# Altium PCB ZNXC.PcbDoc
Units mil, origin at the board's own origin, x right, y up, seen from the top; angles counter-clockwise.
Board outline 2961 x 3255.01 mil, 2 copper layers (Top Layer, Bottom Layer); 77 components, 62 nets, 269 pads, 101 vias.
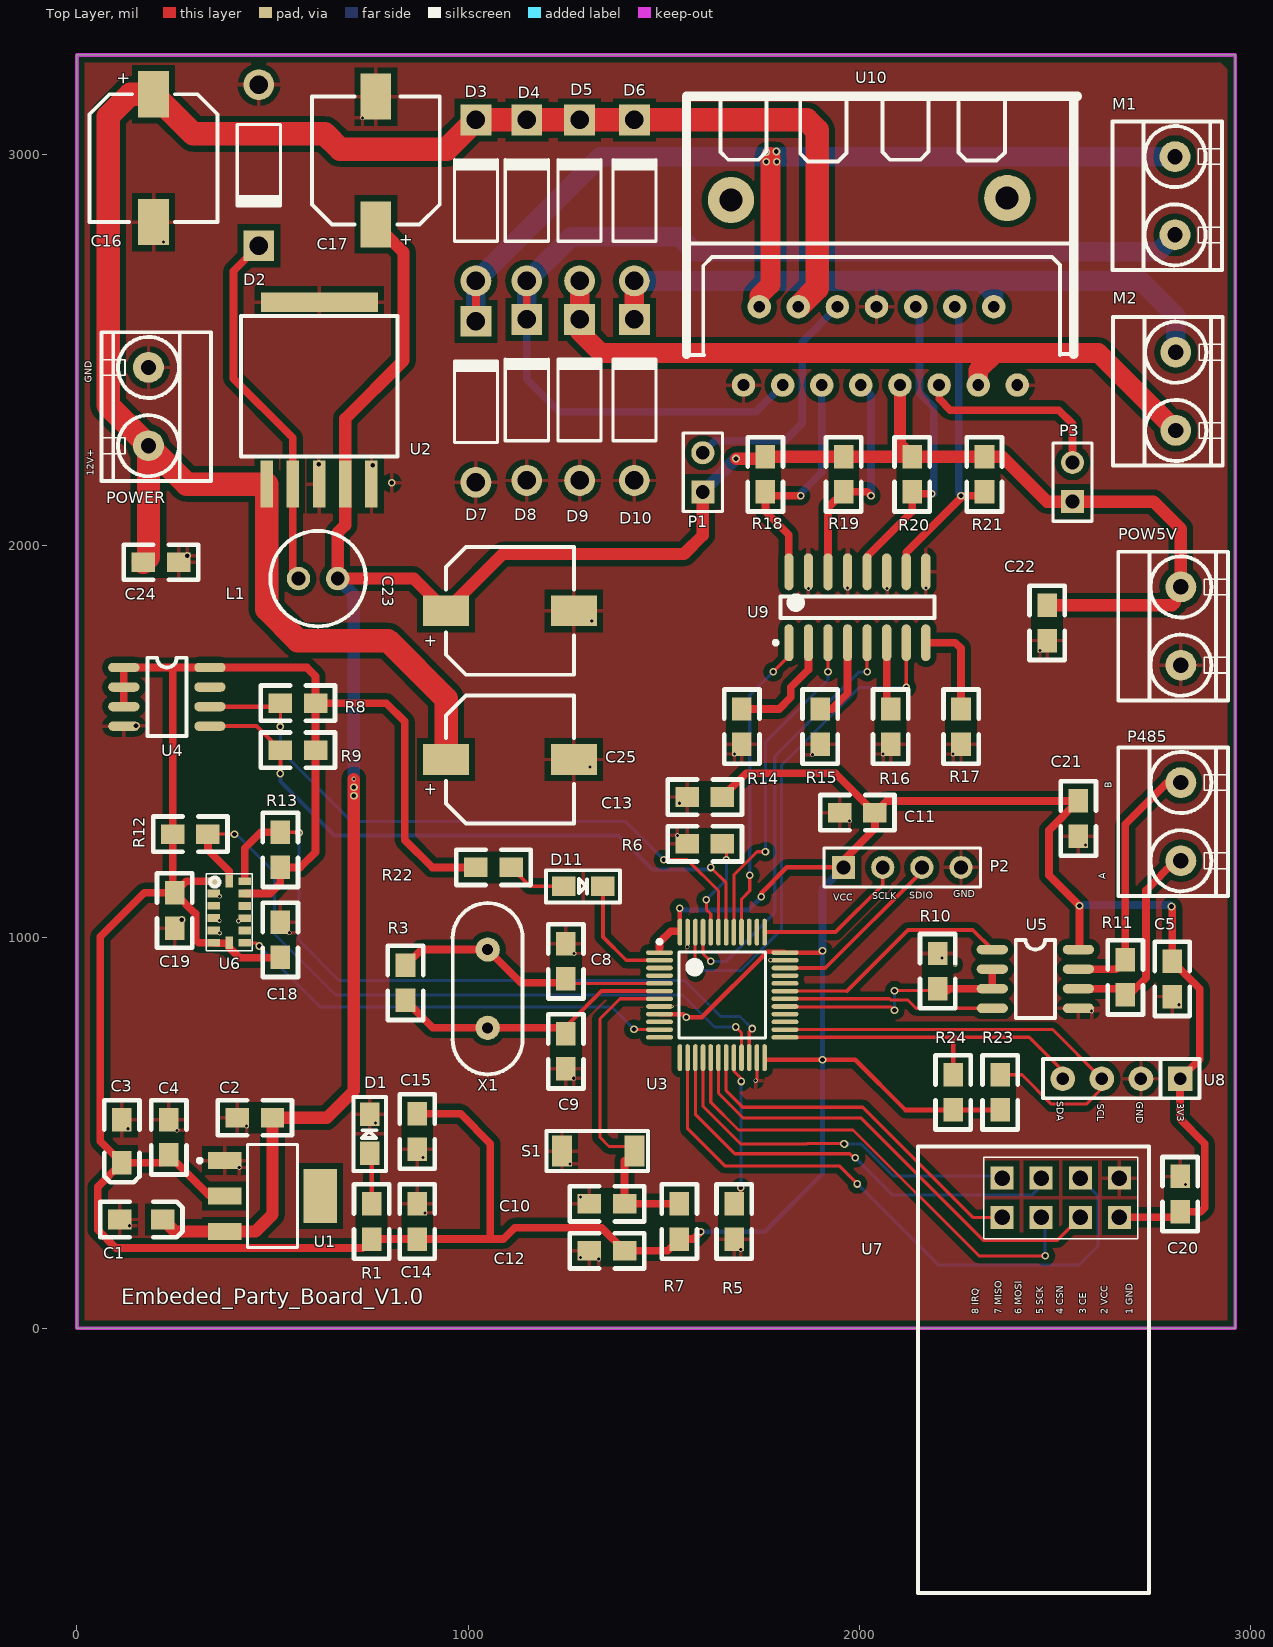
[diagram p0: Top Layer view]
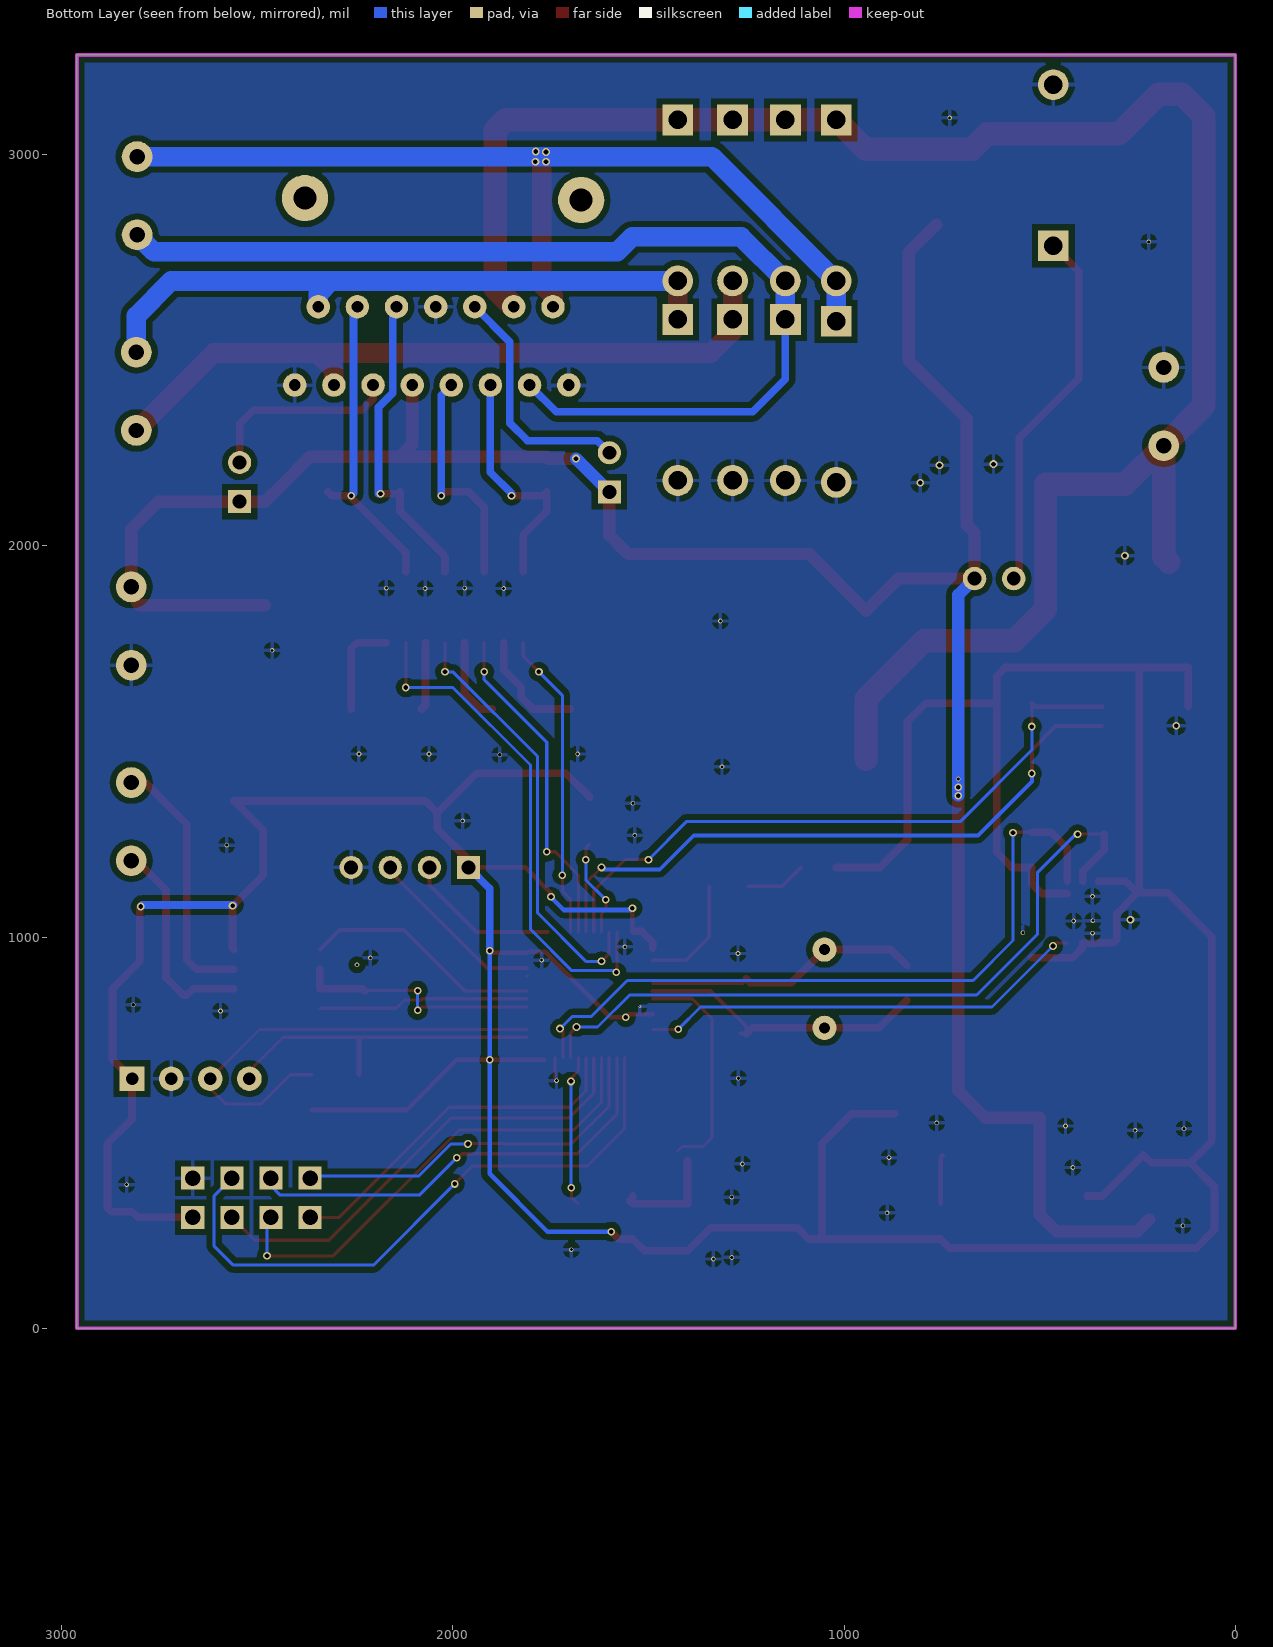
[diagram p1: Bottom Layer view, seen from below]

## Layer stack, top to bottom
Top Layer: signal copper 1.4
Dielectric: dielectric 12.6, FR-4, Dk 4.8
Bottom Layer: signal copper 1.4

## Board outline
0,0 0,3255.01 2961,3255.01 2961,0

## Design rules (kind name [scope] priority, off if disabled: settings)
Clearance Clearance_1 [inpolygon] p1: gap=15
Clearance [All] p2: gap=6
HoleToHoleClearance [All] p1: gap=0 allowstackedmicrovias=TRUE
MinimumSolderMaskSliver [All] p1: minsoldermaskwidth=0
PolygonConnect [All] p1: connectstyle=Relief reliefconductorwidth=10 reliefentries=4 polygonreliefangle="90 Angle"
RoutingVias [All] p1: holewidth=28 width=50 viastyle="Through Hole" minholewidth=28 minwidth=50 maxholewidth=28 maxwidth=50
SilkToSilkClearance [All] p1: silktosilkclearance=0
SilkscreenOverComponentPads [All] p1: minsilkscreentomaskgap=0
SolderMaskExpansion [All] p1: expansion=4
TestPointUsage [All] p1: valid=0 allowmultiple=FALSE
Testpoint [All] p1: side=15 testpointundercomponent=TRUE minsize=40 maxsize=100 preferedsize=60 minholesize=0 maxholesize=40 preferedholesize=32 testpointgrid=1 style=1023 order=0123456789
Width Width_2 [InNet('5V')] p1: maxlimit=31.5 minlimit=31.5 preferedwidth=31.5
Width Width_1 [InNet('12VDC_IN')] p2: maxlimit=100 minlimit=39.37 preferedwidth=39.37
Width [All] p3: maxlimit=100 minlimit=7.87 preferedwidth=19.68
20 further rules are at their usual default settings.

## Components (designator, comment, footprint, x,y, rotation, side; value= is the part's Value field where it differs from the comment)
C1 "10uF" 3216 220,278 r0 top
C2 "104" 0805 500,538 r180 top
C3 "10uF" 3216 115,423 r270 top
C4 "104" 0805 235,443 r90 top
C5 "无源贴片电容" 0805 2800,938 r270 top
C8 "22pF" 0805 1250,893 r90 top
C9 "22pF" 0805 1250,753 r270 top
C10 "104" 0805 1400,318 r180 top
C11 "104" 0805 2040,1318 r180 top
C12 "104" 0805 1400,198 r180 top
C13 "104" 0805 1650,1358 r180 top
C14 "104" 0805 870,228 r90 top
C15 "106" 0805 870,548 r270 top
C16 "100uF" DIP2SMD 180,3138 r0 top
C17 "1000uF" DIP2SMD 780,2838 r180 top
C18 "无源贴片电容" 0805 520,948 r90 top
C19 "无源贴片电容" 0805 250,1023 r90 top
C20 "无源贴片电容" 0805 2820,298 r90 top
C21 "无源贴片电容" 0805 2560,1258 r90 top
C22 "无源贴片电容" 0805 2480,1758 r90 top
C23 "Cap Pol1" DIP2SMD 960,1818 r90 top
C24 "无源贴片电容" 0805 260,1958 r180 top
C25 "Cap Pol1" DIP2SMD 960,1438 r90 top
D1 "Diode" LED 659.97,622.78 r0 top
D2 "1N5822" DO-204AL 465,2973 r270 top
D3 "1N4007" DO-41 1020,2883 r90 top
D4 "1N4007" DO-41 1150,2883 r90 top
D5 "1N4007" DO-41 1285,2883 r90 top
D6 "1N4007" DO-41 1425,2883 r90 top
D7 "1N4007" DO-41 1020,2368 r90 top
D8 "1N4007" DO-41 1150,2373 r90 top
D9 "1N4007" DO-41 1285,2373 r90 top
D10 "1N4007" DO-41 1425,2373 r90 top
D11 "Diode" LED 1420,1218 r270 top
L1 "Inductor" L 720,1798 r180 top
M1 "Header 2" 端子 2805,2898 r90 top locked
M2 "Header 2" 端子 2807,2398 r90 top locked
P1 "Header 2" HDR1X2 1600,2138 r90 top
P2 "SWD" HDR1X4 1960,1178 r0 top
P3 "Header 2" HDR1X2 2545,2113 r90 top
P485 "Header 2" 端子 2820,1298 r90 top locked
POW5V "Header 2" 端子 2820,1798 r90 top locked
POWER "Header 2" 端子 185,2353 r270 top
R1 "510R" 0805 753.24,318 r270 top
R3 "1M" 0805 840,838 r90 top
R5 "10K" 0805 1680,318 r270 top
R6 "10K" 0805 1560,1238 r0 top
R7 "10K" 0805 1540,318 r270 top
R8 "4.7K" 0805 520,1598 r0 top
R9 "4.7K" 0805 520,1478 r0 top
R10 "100R" 0805 2200,958 r270 top
R11 "贴片电阻 1%" 0805 2680,852 r90 top
R12 "4.7K" 0805 245,1263 r0 top
R13 "4.7K" 0805 520,1268 r270 top
R14 "4.7K" 0805 1700,1493 r90 top
R15 "4.7K" 0805 1900,1493 r90 top
R16 "4.7K" 0805 2080,1493 r90 top
R17 "4.7K" 0805 2260,1493 r90 top
R18 "4.7K" 0805 1760,2138 r90 top
R19 "4.7K" 0805 1960,2138 r90 top
R20 "4.7K" 0805 2135,2138 r90 top
R21 "4.7K" 0805 2320,2138 r90 top
R22 "Res2" 0805 1020,1178 r0 top
R23 "4.7K" 0805 2360,558 r90 top
R24 "4.7K" 0805 2240,558 r90 top
S1 "SW-SPST" SWITCH 1330,453 r180 top
U1 "AMS1117-3.3" SOT223 500,338 r270 top
U2 "LM2576" LM2576 625,2373 r0 top
U3 "STM32F103C8T6" STM32F103C8T6 1650,853 r0 top
U4 "MB85RC16PNF-G-JNE1" SO-8 120,1689 r0 top
U5 "MAX3485" SO-8 2340,968 r0 top
U6 "ADXL345" LGA14-ADXL345 350,1143 r0 top
U7 "NRF24L01" NRF24L01 2150,-677 r90 top
U8 "OLED" IDCD4 2820,638 r180 top
U9 "TLP521-4G" SOP-16 1995,1843 r90 top
U10 "L298N" L298N 2040,2758 r0 top locked
X1 "8M" 晶振 1050,873 r90 top

## Footprints (in the part's own frame and the unit in brackets; to place one, negate y for a bottom-side part, rotate by r counter-clockwise, add the part's x,y. Pads: shape width x height; smd on the part's side, far side on the other; paste and mask are expansions set on the pad)
0805 [mil]
  rect 60x50 smd: 1(0,0) 2(90,0)
  silkscreen extent -50,-45 140,45
3216 [mil]
  rect 60x50 smd: 1(0,0) 2(-110,0)
  silkscreen extent -160,-45 50,45
DIP2SMD [mm]
  rect 2x3 smd: 1(0.405,0.417) 2(0.405,-7.883)
  silkscreen extent -3.74,-7.88 4.56,0.42
DO-41 [mm] "Diode, Axial; Body 5.2 x 2.7 mm (LxDia. max), Lead Dia. 0.86 mm (max)"
  round 2 hole 1.2: 1(-5.23,0)
  rect 2x2 hole 1.2: 2(5.23,0)
  silkscreen extent -2.65,-1.42 2.73,1.4
DO-204AL [mm] "Diode, Axial; Body 5.2 x 2.7 mm (LxDia. max), Lead Dia. 0.86 mm (max)"
  round 2 hole 1.2: 1(-5.23,0)
  rect 2x2 hole 1.2: 2(5.23,0)
  silkscreen extent -2.65,-1.41 2.75,1.4
HDR1X2 [mm] "Connector; Header; 2 Position"
  rect 1.5x1.5 hole 0.9: 1(0,0)
  round 1.5 hole 0.9: 2(2.54,0)
  silkscreen extent -1.27,-1.27 3.81,1.27
HDR1X4 [mm] "Connector; Header; 4 Position"
  rect 1.5x1.5 hole 0.9: 1(0,0)
  round 1.5 hole 0.9: 2(2.54,0) 3(5.08,0) 4(7.62,0)
  silkscreen extent -1.27,-1.27 8.89,1.27
IDCD4 [mm]
  rect 1.6x1.6 hole 0.813: 1(0,0)
  round 1.6 hole 0.813: 2(2.54,0) 3(5.08,0) 4(7.62,0)
  silkscreen extent -1.27,-1.27 8.89,1.27
L [mil]
  round 60 hole 35: 1(153.54,-118.34) 2(53.54,-118.34)
  silkscreen extent -19,-240 226,4
L298N [mil]
  round 118.11 hole 59.06: 0(-368,126) 0(338,131)
  round 60 hole 30: 1(-336,-347) 2(-296,-147) 3(-236,-347) 4(-196,-147) 5(-136,-347) 6(-96,-147) 7(-36,-347) 8(4,-147) 9(64,-347) 10(104,-147) 11(164,-347) 12(204,-147) 13(264,-347) 14(304,-147) 15(364,-347)
  silkscreen extent -484,-270 518,391
LED [mil]
  rect 50x60 smd: 1(88.14,-175.52) 2(88.14,-75.52)
  silkscreen extent 47,-220 130,-31
LGA14-ADXL345 [mm] "LCC, 14-Pins, Body 3.0x5.0mm (max), Pitch 0.80mm, IPC Medium Density"
  rect 0.813x0.5 smd: 1(0,0) 2(0,-0.8) 3(0,-1.6) 4(0,-2.4) 5(0,-3.2) 6(0,-4) 8(2.01,-4.01) 9(2.01,-3.21) 10(2.01,-2.41) 11(2.01,-1.61) 12(2.01,-0.81) 13(2.01,-0.01)
  rect 0.5x0.813 smd: 7(1.01,-4.01) 14(1.01,-0.01)
  silkscreen extent -0.49,-4.51 2.51,0.49
LM2576 [mil]
  rect 32x120 smd: 1(-140,-215) 2(-73,-215) 3(-6,-215) 4(61,-215) 5(128,-215)
  rect 300x50 smd: 6(-5,250)
  silkscreen extent -205,-145 195,215
NRF24L01 [mm]
  rect 1.5x1.5 hole 1: 1(26.94,-13.08) 2(24.4,-13.08) 3(26.94,-10.54) 4(24.4,-10.54) 5(26.94,-8) 6(24.4,-8) 7(26.94,-5.46) 8(24.4,-5.46)
  silkscreen extent 0,-15 29,0
SO-8 [mil]
  oval 80x24 smd: 1(0,0) 2(0,-50) 3(0,-100) 4(0,-150) 5(220,-150) 6(220,-100) 7(220,-50) 8(220,0)
  silkscreen extent 60,-175 160,25
SOP-16 [mm] "SOP, 16-Leads, Body 10.0x4.0mm (max), Pitch 1.27mm, IPC Medium Density"
  oval 2.4x0.6 smd: 1(-2.3,4.445) 2(-2.3,3.175) 3(-2.3,1.905) 4(-2.3,0.635) 5(-2.3,-0.635) 6(-2.3,-1.905) 7(-2.3,-3.175) 8(-2.3,-4.445) 9(2.3,-4.445) 10(2.3,-3.175) 11(2.3,-1.905) 12(2.3,-0.635) 13(2.3,0.635) 14(2.3,1.905) 15(2.3,3.175) 16(2.3,4.445)
  silkscreen extent -2.42,-5 0.7,5.42, body extent -2,-5 2,5, height 1.75
SOT223 [mm] "SOT-223/SC-73; 4 Leads; Body 6.7 x 7.3 mm, inc. leads (LxW max)"
  rect 1.1x2.15 smd: 1(-2.3,-3.1) 2(0,-3.1) 3(2.3,-3.1)
  rect 3.5x2.15 smd: 4(0,3.1)
  silkscreen extent -3.35,-4.85 3.35,1.62
STM32F103C8T6 [mm]
  oval 1.75x0.3 smd: 1(-4.082,2.726) 2(-4.082,2.226) 3(-4.082,1.726) 4(-4.082,1.226) 5(-4.082,0.726) 6(-4.082,0.226) 7(-4.082,-0.274) 8(-4.082,-0.774) 9(-4.082,-1.274) 10(-4.082,-1.774) 11(-4.082,-2.274) 12(-4.082,-2.774) 25(4.068,-2.774) 26(4.068,-2.274) 27(4.068,-1.774) 28(4.068,-1.274) 29(4.068,-0.774) 30(4.068,-0.274) 31(4.068,0.226) 32(4.068,0.726) 33(4.068,1.226) 34(4.068,1.726) 35(4.068,2.226) 36(4.068,2.726)
  oval 0.3x1.75 smd: 13(-2.757,-4.099) 14(-2.257,-4.099) 15(-1.757,-4.099) 16(-1.257,-4.099) 17(-0.757,-4.099) 18(-0.257,-4.099) 19(0.243,-4.099) 20(0.743,-4.099) 21(1.243,-4.099) 22(1.744,-4.099) 23(2.243,-4.099) 24(2.744,-4.099) 37(2.744,4.051) 38(2.243,4.051) 39(1.744,4.051) 40(1.243,4.051) 41(0.743,4.051) 42(0.243,4.051) 43(-0.257,4.051) 44(-0.757,4.051) 45(-1.257,4.051) 46(-1.757,4.051) 47(-2.257,4.051) 48(-2.757,4.051)
  silkscreen extent -4.21,-2.82 2.79,3.55
SWITCH [mm]
  rect 1.3x2 smd paste+0 mask+0.2: 1(-2.413,0) 2(2.287,0)
  silkscreen extent -3.3,-1.3 3.3,1.3
晶振 [mil]
  round 62 hole 28: 1(-105,0) 2(95,0)
  silkscreen extent -224,-89 214,89
端子 [mm]
  round 2 hole 1: 1(2.464,-0.051) 2(-2.616,-0.051)
  silkscreen extent -4.9,-3.1 4.75,4.01

## Part data
C1 C16 C17: library part ELECTRO2
C2: library part CAP, "Capacitor"
C3: library part "CAPACITOR POL", "Capacitor"
C4 C5 C18 C19 C20 C21 C22 C24: library part Cap, "Capacitor"
C8 C9 C10 C11 C12 C13 C14 C15: library part CAP1, "Capacitor"
C23 C25: "Polarized Capacitor (Radial)"
D1 D11: "Default Diode"
D2: library part "Diode 11DQ03", "Schottky Rectifier"
D3 D4 D5 D6 D7 D8 D9 D10: library part "Diode 1N4007", "1 Amp General Purpose Rectifier"
M1 M2 P1 P3 P485 POW5V POWER: "Header, 2-Pin"
P2: library part "Header 4H", "Header, 4-Pin, Right Angle"
R1 R3 R5 R6 R7: library part R
R8 R9 R12 R13 R14 R15 R16 R17 R18 R19 R20 R21 R23 R24: library part Res2, "贴片电阻 精度1%"
R10 R11: library part Res2, "Resistor"
R22: "Resistor"
S1: "Single-Pole, Single-Throw Switch"
U1: library part LT1085CM-3.3
U4: "EEPROM存储"
U5: library part SP3485, "485总线芯片"
X1: library part XTAL_SMD, "Crystal Oscillator"

## Via types
v1: diameter 19.68, hole 11.81, Top Layer to Bottom Layer, 47 vias
v2: diameter 11.81, hole 7.87, Top Layer to Bottom Layer, 46 vias
v3: diameter 20, hole 12, Top Layer to Bottom Layer, tented both sides, 7 vias
v4: diameter 7.87, hole 3.94, Top Layer to Bottom Layer, 1 vias

## Nets (pads, with @x,y where several pads share a name; then routed paths per layer and width w, separated by ;. In a path a pad name is that pad's centre, name@x,y a point inside that pad or via, vN(x,y) a via of type N, cw(c..) or ccw(c..) an arc to the next point about the centre after c; other vN are vias at no path point)
3V3: C3.1 C4.1 C5.1 C11.1 C12.1 C13.1 C14.1 C15.1 C18.1 C19.2 C20.1 C21.2 P2.1 R1.2 R7.2 R8.2 R9.2 R12.1 R13.2 R22.1 R23.1 R24.1 U1.2 U3.1 U3.9 U3.24 U3.36 U3.48 U4.1 U4.2 U4.3 U4.8 U5.8 U6.1 U6.6 U6.7 U6.12 U7.2 U8.1 | length 12418
  Top Layer w11.81: U3.9 1550.15,802.85 v1(1558,795) 1598,795 1608,805 1751.19,948.19 1751.19,950.03 1763.97,962.81 1807.7,962.81 U3.36 v1@1901.33,960.33 ; v1(1541,1074) 1541,1067 1541.48,1066.52 U3.48 ; v1(1749,1103) 1749,1112 1815,1178 P2.1 ; 1766,686 v1(1906,686) 1990,686 2118,558 R24.1 R23.1
  Top Layer w19.68: U4.3 U4.2 U4.1 237,1689 ; U6.1 280,1143 C19.2 ; U1.2 340,338 C4.1 215,423 C3.1 ; U6.12 494.11,1111.11 520,1137 R13.2 571,1178 610,1217 R9.2 R8.2 ; C18.1 519.32,947.32 415.68,947.32 389.76,973.24 U6.7 388.89,984.25 351.27,984.25 U6.6 311.48,985.52 303,994 303,1060 C19.2 ; C15.1 981,548 1057,472 1057,228 ; R22.1 908,1178 838,1248 838,1551 791,1598 R8.2 ; 1489.31,972 1489.31,986.31 1518,1015 U3.48@1537,1015 ; v1(1595,247) 1576,228 R7.2 1510,198 C12.1 1341,257 1119,257 1090,228 1057,228 ; C13.1 1711,1419 1939,1419 C11.1 ; P2.1 1960,1197 2040,1277 C11.1 ; U5.8 2563,971 v1(2563,1080) 2485,1158 2485,1273 C21.2 2070,1348 C11.1 ; U7.2 2805.63,283.63 C20.1 2873,298 2883,308 2883,472 2820,535 U8.1 2870,688 2870,868 C5.1 v1@2800,1076 ; C3.1 53,361 53,251.94 99.94,205 730.24,205 R1.2 C14.1 1057,228 ; C3.1 60,478 60,1001 172,1113 C19.2 ; 237,1689 245,1681 R12.1 245,1118 C19.2 ; 237,1689 U4.8 588,1689 610,1667 R8.2
  Bottom Layer w11.81: v1(1541,1074) 1545.75,1069.25 1716.25,1069.25 v1@1749,1102 ; v1(1595,247) 1758,247 1906,395 v1(1906,686) ; v1(1906,965) v1(1906,686) ; v1@1908,684 v1(1906,686)
  Bottom Layer w19.68: v1@1906,964 v1(1906,965) 1906,1124 P2.1 ; v1@2560,1082 2794,1082 v1(2798,1078)
5V: C1.1 C2.1 C17.1 C22.2 C23.1 L1.2 P1.1 P3.1 POW5V.1 R18.2 R19.2 R20.2 R21.2 U1.3 U2.4 U10.9 | length 6335.5
  Top Layer w31.5: C1.1 250.55,247.45 U1.3 456.45,247.45 500,291 C2.1 639,538 708,607 v2(708,1404) ; C17.1 835,2750.61 835,2474 686,2325 U2.4 686,2053 666.46,2033.46 L1.2 861.19,1916.34 C23.1 1088.61,1979 1462,1979 1476,1979 1552,1979 1600,2027 P1.1 ; v3(1685,2223) 1755,2223 R18.2 R19.2 R20.2 ; U10.9 2104,2259 R20.2 ; C22.2 2800,1848 2807,1855 ; POW5V.1 2822,2043 2752,2113 P3.1 2480,2113 2433.5,2159.5 2365,2228 R21.2 R20.2
  Bottom Layer w31.5: L1.2 708,1874.8 v3@708,1362 ; P1.1 v3(1685,2223)
  other v3: 708,1361 708,1383
12VDC_IN: C16.1 C24.2 C25.1 D3.2 D4.2 D5.2 D6.2 POWER.1 U2.1 U10.4 | length 4987.1
  Top Layer w39.37: POWER.1@162,2256 POWER.1 ; U10.4 U10.4@1845,2612
  Top Layer w60: C24.2 183,1971 POWER.1 ; C25.1 943.57,1609.43 795,1758 565,1758 485,1838 U2.1 281,2158 POWER.1 ; U10.4@1845,2612 1892,2659 1892,3062 1865.09,3088.91 D6.2 D5.2 D4.2 D3.2 945.09,3014 673,3014 634,3053 297.39,3053 C16.1 136.11,3154.43 80,3098.31 80,2359 POWER.1
GND: C1.2 C2.2 C3.2 C4.2 C5.2 C8.2 C9.2 C10.2 C11.2 C12.2 C13.2 C14.2 C15.2 C16.2 C17.2 C18.2 C19.1 C20.2 C21.1 C22.1 C23.2 C24.1 C25.2 D1.2 D2.1 D7.1 D8.1 D9.1 D10.1 P2.4 POW5V.2 POWER.2 R5.2 R6.1 R10.1 R14.1 R15.1 R16.1 R17.1 S1.2 U1.1 U2.3 U2.5 U2.6 U3.8 U3.23 U3.35 U3.47 U4.4 U5.5 U6.2 U6.4 U6.5 U6.10 U7.1 U8.2 U9.9 U9.11 U9.13 U9.15 U10.1 U10.8 U10.15 | length 60
  Top Layer w7.87: v2(1735,633) 1738.33,636.33 U3.23
  other v1: 268,1044 151,1540 282,1975 805,2161 756,2206 618,2209
  other v2: 1334,177 1287,181 1697,201 134,262 890,295 1287,335 2834,367 415,411 1260,420 885,436 256,506 131,510 434,517 763,525 1270,639 2594,811 2817,827 1773,941 2211,947 1271,958 1560.16,974.8 365,1010 543,1011 413,1041 364,1042 365,1104 2578,1235 1535,1260 1975,1297 1540,1342 1312,1435 1880,1466 1681,1468 2061,1468 2240,1468 2462,1733 1316,1808 1870,1891 2071,1891 1970,1892 2170,1892 221,2777 730,3094
  other v4: 1522,823
IIC_SCL: R12.2 U3.21 U6.14 | length 1874.1
  Top Layer w7.87: R12.2 v1(403,1263) ; v1(1684,770) 1698.96,755.04 U3.21
  Top Layer w19.68: R12.2 335,1223 389.76,1168.24 U6.14
  Bottom Layer w7.87: v1@404,1267 505,1166 505,1008 661,852 1548,852 1630,770 v1(1684,770)
IIC_SDA: R13.1 U3.22 U6.13 | length 1844.4
  Top Layer w7.87: R13.1 567,1268 v1(568,1267) ; U3.22 1718.64,758.64 v1(1726,766)
  Top Layer w19.68: U6.13 429.13,1227.13 470,1268 R13.1
  Bottom Layer w7.87: v1@568,1266 568,991 670,889 1554,889 1646,797 1695,797 v1(1726,766)
NER_IRQ: U3.19 U7.8 | length 923.7
  Top Layer w7.87: U3.19 1659.59,607.41 1702,565 2009,565 2290.37,283.63 U7.8
NetC8_1: C8.1 R3.2 U3.5 X1.2 | length 710
  Top Layer w7.87: C8.1@1261.41,881.59 U3.5
  Top Layer w11.81: C8.1 C8.1@1261.41,881.59
  Top Layer w19.68: R3.2 880,968 X1.2 1135,883 1240,883 C8.1
NetC9_1: C9.1 R3.1 U3.6 X1.1 | length 755.2
  Top Layer w10: C9.1@1265,753 C9.1 1250,771 1340.91,861.91 U3.6
  Top Layer w19.68: R3.1 910,768 X1.1 1235,768 C9.1
NetD1_1: D1.1 R1.1 | length 126.6
  Top Layer w11.81: D1.1@748.14,442.48 753.24,437.38 R1.1
NetD2_2: D2.2 L1.1 U2.2 | length 946.6
  Top Layer w19.68: 545,2283 552,2276 U2.2 552,1930.8 L1.1
  Top Layer w20: D2.2 400,2702.09 400,2428 545,2283
NetD3_1: D3.1 D7.2 M1.1 U10.2 | length 2535.6
  Top Layer w19.68: D7.2 D3.1 ; U10.2 U10.2@1755,2622
  Top Layer w50: U10.2 1744,2639 1773,2668 1773,2994
  Bottom Layer w50: D7.2 D3.1 1337.91,2995 1688,2995 M1.1
  other v3: 1762,2982 1789,2982 1762,3007 1788,3008
NetD4_1: D4.1 D8.2 M1.2 U10.3 | length 2803.6
  Top Layer w19.68: D8.2 D4.1
  Bottom Layer w19.68: D8.2 1150,2426 1233,2343 1736,2343 U10.3
  Bottom Layer w50: D8.2 D4.1 1262.91,2790 1541.46,2790 1580,2751.46 2763.46,2751.46 M1.2
NetD5_1: D5.1 D9.2 M2.2 U10.13 | length 1880
  Top Layer w19.68: D9.2 D9.2@1306.57,2578.91 ; U10.13 U10.13@2304.31,2411
  Top Layer w50: D5.1 D9.2 1285,2548 1340,2493 2348,2493 ; U10.13 2304,2449 2348,2493 ; M2.2 2611,2493 2348,2493
NetD6_1: D6.1 D10.2 M2.1 U10.14 | length 1691.9
  Top Layer w50: D10.2 D6.1
  Bottom Layer w50: D6.1 2310.91,2677.09 ; U10.14 2344,2644 2310.91,2677.09 ; M2.1 2809,2588 2719.91,2677.09 2310.91,2677.09
NetD11_1: D11.1 R22.2 | length 154.4
  Top Layer w10: R22.2 1158.14,1129.86 D11.1
NetP1_2: P1.2 U10.6 | length 623.8
  Top Layer w19.68: U10.6@1944,2607 U10.6
  Bottom Layer w19.68: P1.2 1631,2269 1809,2269 1854.16,2314.16 1854.16,2390 1854.16,2521.16 U10.6
NetP3_2: P3.2 U10.11 | length 501.5
  Top Layer w19.68: U10.11 2204,2376 2233,2347 2510,2347 2545,2312 P3.2
NetR5_1: R5.1 U3.20 | length 387.8
  Top Layer w7.87: U3.20 1679.27,657.72 1699,637.99 v1@1699,632 ; R5.1 1697,335 v1(1697,359)
  Bottom Layer w7.87: v1@1698,359 v1(1698,631)
NetR6_2: R6.2 U3.44 | length 260
  Top Layer w7.87: v1@1612,1098 v1(1609,1095) 1609,1070 1620.22,1058.78 U3.44 U3.44@1620,1012.71 ; R6.2 1660,1228 v1(1660,1198)
  Bottom Layer w7.87: v1(1609,1095) 1660,1146 v1(1660,1198)
NetR14_2: R14.2 U9.2 | length 295.6
  Top Layer w19.68: R14.2 1795.08,1583 1825.08,1613 1825.08,1638.08 1870,1683 U9.2
NetR15_2: R15.2 U9.4 | length 216
  Top Layer w19.68: R15.2 1930,1583 1970,1623 U9.4
NetR16_2: R16.2 U9.6 | length 173.6
  Top Layer w19.68: U9.6 2070,1593 R16.2
NetR17_2: R17.2 U9.8 | length 251
  Top Layer w19.68: U9.8 2245.55,1752.45 2260,1738 R17.2
NetR18_1: R18.1 U9.16 U10.5 | length 628.8
  Top Layer w19.68: U9.16 1820,2028 1760,2088 R18.1 1770,2128 v1(1850,2128)
  Bottom Layer w19.68: v1(1850,2128) 1850,2134 1904,2188 U10.5
NetR19_1: R19.1 U9.14 U10.7 | length 608.9
  Top Layer w19.68: U9.14 1920,2098 R19.1 ; R19.1@1980,2138 R19.1 ; v1(2030,2128) 2020,2138 R19.1
  Bottom Layer w19.68: U10.7 2030,2385 v1(2030,2128)
NetR20_1: R20.1 U9.12 U10.10 | length 820.1
  Top Layer w19.68: U9.12 2020,1973 2135,2088 R20.1 2140,2133 v1(2185,2133) ; U10.10 U10.10@2153.84,2601.16
  Bottom Layer w19.68: U10.10 2153.84,2601.16 2153.84,2390.67 2190,2354.51 2190,2133 v1(2185,2133)
NetR21_1: R21.1 U9.10 U10.12 | length 820.1
  Top Layer w19.68: U9.10 2120,1983 2260,2123 v1(2260,2128) 2310,2128 R21.1 ; U10.12 U10.12@2253.84,2601.16
  Bottom Layer w19.68: U10.12 2253.84,2601.16 2253.84,2134.16 v1(2260,2128)
NRF_CE: U3.14 U7.3 | length 1587.5
  Top Layer w7.87: U3.14 1561.16,509.84 1656,415 1949,415 v1(1995,369)
  Bottom Layer w7.87: v1(1995,369) 2202.78,161.22 2561.22,161.22 2610,210 2610,338.59 U7.3
NRF_CS: U3.18 U7.4 | length 1197.1
  Top Layer w7.87: U3.18 1639.9,601.1 1704,537 1869,537 ; 1870,538 1869,537 ; U7.4 2506.33,225 2317,225 2005,537 1869,537
NRF_MISO: U3.16 U7.7 | length 965.6
  Top Layer w7.87: U3.16 1600.53,567.47 1697,471 1866,471 1867,472 v1(1961,472) v1(1962,471)
  Bottom Layer w7.87: v1(1962,471) 2005,471 2087,389 2359.59,389 U7.7
NRF_MOSI: U3.17 U7.6 | length 1229.1
  Top Layer w7.87: U3.17 1620.22,577.78 1691,507 1984,507 2306,185 v1@2470,185
  Bottom Layer w7.87: U7.6 2475,273.59 v1(2475,185)
NRF_SCK: U3.15 U7.5 | length 1142.7
  Top Layer w7.87: U3.15 1580.85,547.15 1682,446 1976,446 v1@1988,434
  Bottom Layer w7.87: v1(1990,436) 2085.83,340.17 2441.17,340.17 2464.96,363.96 U7.5
NRST: C10.1 R7.1 S1.1 U3.7 | length 860.3
  Top Layer w7.87: S1.1 1413.32,464.68 1360.32,464.68 1337,488 1337,791 1388.22,842.22 U3.7
  Top Layer w19.68: S1.1@1400,428 C10.1 R7.1 ; R7.1@1540,338 R7.1 ; R7.1@1548,326 R7.1
PA0: U3.10
PA1: U3.11 U6.8 | length 1151
  Top Layer w7.87: U6.8 457.87,985.13 v1(466,977) ; v1@1425,763 1425.48,763.48 U3.11
  Bottom Layer w7.87: v1(466,977) 622,821 1367,821 v1(1424,764)
PA2: U3.12
PA3: U3.13
PA11: U3.32
PA12: U3.33 | length 1.6
  Top Layer w7.87: U3.33 U3.33@1811.33,900.13
PA15: U3.38
PB3: U3.39
PB4: U3.40 U9.1 | length 810.1
  Top Layer w7.87: U3.40 1698.96,1096.96 1720,1118 v1(1720,1158) ; v1(1780,1678) 1820,1718 U9.1
  Bottom Layer w7.87: v1(1720,1158) 1720,1258 ; 1720,1238 1720,1258 ; v1(1780,1678) 1720,1618 1720,1258
PB5: U3.41 U9.3 | length 852.2
  Top Layer w7.87: U3.41 1679.27,1158.73 1738.54,1218 v1(1760,1218) ; v1(1920,1678) U9.3
  Bottom Layer w7.87: v1(1760,1218) 1760,1498 1920,1658 v1(1920,1678)
PB6: R9.1 U3.42 U4.5 | length 1662.3
  Top Layer w7.87: v1(1620,1178) 1659.59,1138.41 U3.42
  Top Layer w10: U4.5 459,1539 R9.1 v1(520,1418)
  Bottom Layer w10: v1(520,1418) 520,1398 658,1260 1384.16,1260 1471,1173.16 1615.16,1173.16 v1(1620,1178)
PB7: R8.1 U3.43 U4.6 | length 1678.3
  Top Layer w7.87: v1(520,1538) R8.1 ; v1(1500,1198) 1560,1198 1639.9,1118.1 U3.43
  Top Layer w11.81: U4.6 511,1589 R8.1
  Bottom Layer w7.87: v1(520,1538) 520,1478 703,1295 1403,1295 v1(1500,1198)
PB8: U3.45 U9.5 | length 1097.8
  Top Layer w7.87: U3.45 1600.53,957.47 v1(1620,938) ; v1(2020,1678) U9.5
  Bottom Layer w7.87: v1(1620,938) 1660,938 1783.78,1061.78 1783.78,1461.78 2000,1678 v1(2020,1678)
PB9: U3.46 U9.7 | length 1303.7
  Top Layer w7.87: U3.46 1580,1011.65 1580,912 v1(1582,910) ; v1(2120,1638) U9.7
  Bottom Layer w7.87: v1(1582,910) 1586.22,914.22 1696.22,914.22 1801.65,1019.65 1801.65,1439.65 2000,1638 v1(2120,1638)
PB12: R23.2 U3.26 U8.3 | length 1194.6
  Top Layer w7.87: U3.26 1810.33,763.64 2494.36,763.64 U8.3 2620,613 2580,573 2491,573 2416,648 R23.2
PB13: R24.2 U3.25 U8.4 | length 862
  Top Layer w7.87: U3.25 2242,743.79 2434.21,743.79 2520,658 U8.4
  Top Layer w11.81: R24.2 2240,741.79 2242,743.79
PB14: U3.27
PB15: U3.28
PC13: D11.2 U3.2 | length 299
  Top Layer w10: D11.2 1344.48,1000.52 1404.35,940.65 U3.2
PC14: U3.3
PC15: U3.4
RS485_A: P485.2 R11.1 U5.6 | length 541.9
  Top Layer w19.68: U5.6 2664,868 R11.1 2689,852 2733,896 2733,1119.95 2808.05,1195 P485.2
RS485_B: P485.1 R11.2 U5.7 | length 662.3
  Top Layer w19.68: U5.7 2656,918 R11.2 2680,1288 2787,1395 P485.1
RS485_EN: R10.2 U3.29 U5.2 U5.3 | length 635.8
  Top Layer w7.87: U3.29 1811.37,821.35 2081.65,821.35 v1(2090,813) ; v1(2090,863) 2225,863
  Top Layer w19.68: 2225,863 2230,868 U5.3 U5.2
  Bottom Layer w7.87: v1(2090,813) v1(2090,863)
RS485_RX: U3.31 U5.1 | length 615.2
  Top Layer w7.87: U3.31 1968.91,861.91
  Top Layer w10: 1968.91,861.91 2125,1018 2290,1018 U5.1
RS485_TX: U3.30 U5.4 | length 539.9
  Top Layer w7.87: U3.30 2077.15,842.22 2080.15,839.22 2123.78,839.22 2145,818 U5.4
SWCLK: P2.2 U3.37 | length 396.9
  Top Layer w10: U3.37 1939.5,1012.5 2060,1133 P2.2
SWDIO: P2.3 U3.34 | length 462.2
  Top Layer w10: U3.34 1912.96,920.96 2160,1168 P2.3
pads on no net: U1.4 U4.7 U6.3 U6.9 U6.11 U10.0
copper on no net:
  other v2: 2245,929

## Polygon pours and split planes (outlines as drawn)
GND on Top Layer "Bottom Layer-No Net" (solid, remove dead copper): 27,14 41,0 2961,0 2961,3198 2937,3222 2892,3267 -28,3267 -28,51 36,-13
GND on Bottom Layer "Bottom Layer-No Net" (solid, remove dead copper): 0,3247 2971,3247 2971,12 2946,-13 2933,0 13,0 13,3255.01

## Keep-outs
Keep-Out Layer:
  the board outline again, w10

## Silkscreen, mask and mechanical layers (free items; w line width, h text height)
Top Overlay:
  text "GND" at 44,2417 h30 r90
  text "12V+" at 49,2179 h30 r90
  text "B" at 2652,1381 h30 r90
  text "A" at 2637,1148 h30 r90
  text "GND" at 2240,1096 h30
  text "SDIO" at 2128,1092 h30
  text "SCLK" at 2033,1090 h30
  text "VCC" at 1933,1087 h30
  text "SDA" at 2498,580 h30 r270
  text "GND" at 2701,579 h30 r270
  text "3V3" at 2806,575 h30 r270
  text "SCL" at 2602,574 h30 r270
  text "Embeded_Party_Board_V1.0" at 114,61 h40

## Text inside footprints (layer, text, board x,y; h text height)
C16: Top Overlay "+" at 132.76,3177.37 h30 r90
C17: Top Overlay "+" at 827.24,2798.63 h30 r270
C23: Top Overlay "+" at 920.63,1770.76 h30 r180
C25: Top Overlay "+" at 920.63,1390.76 h30 r180
U7: Top Overlay "1 GND" at 2705.12,35.6 h30 r90; Top Overlay "2 VCC" at 2642.13,35.54 h30 r90; Top Overlay "3 CE" at 2587.01,35.6 h30 r90; Top Overlay "4 CSN" at 2527.95,35.6 h30 r90; Top Overlay "5 SCK" at 2476.77,35.6 h30 r90; Top Overlay "6 MOSI" at 2421.65,35.6 h30 r90; Top Overlay "7 MISO" at 2370.47,35.6 h30 r90; Top Overlay "8 IRQ" at 2311.42,35.6 h30 r90